# Altium PCB PIEZO_ver2_pcb2.PcbDoc
Units mil, origin at the board's own origin, x right, y up, seen from the top; angles counter-clockwise.
Board outline 800.03 x 600.03 mil, 2 copper layers (Top Layer, Bottom Layer); 7 components, 10 nets, 27 pads, 0 vias.
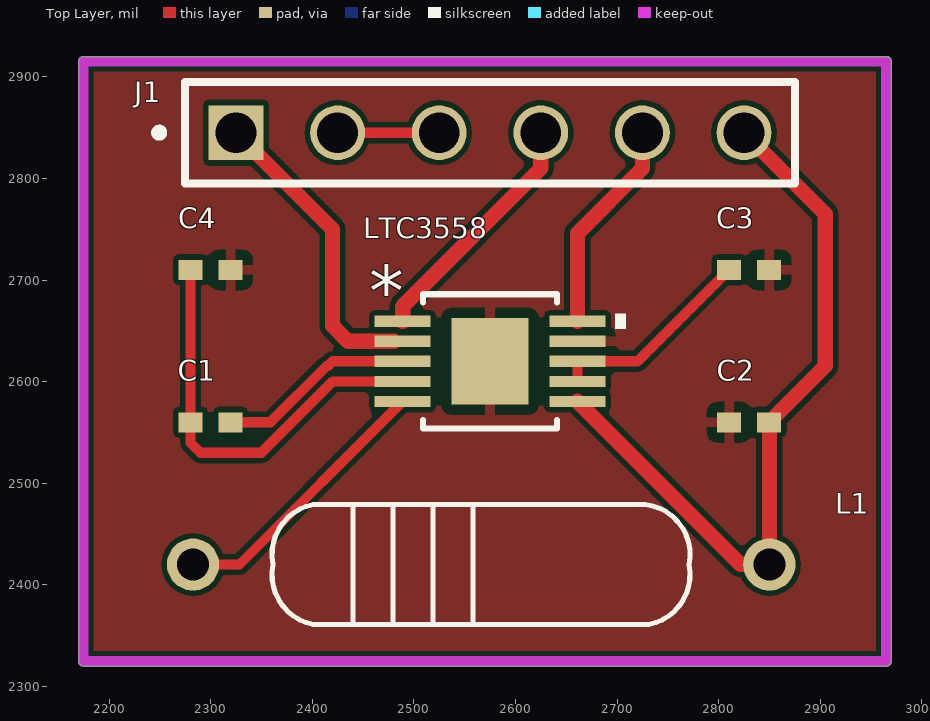
[diagram p0: Top Layer view]
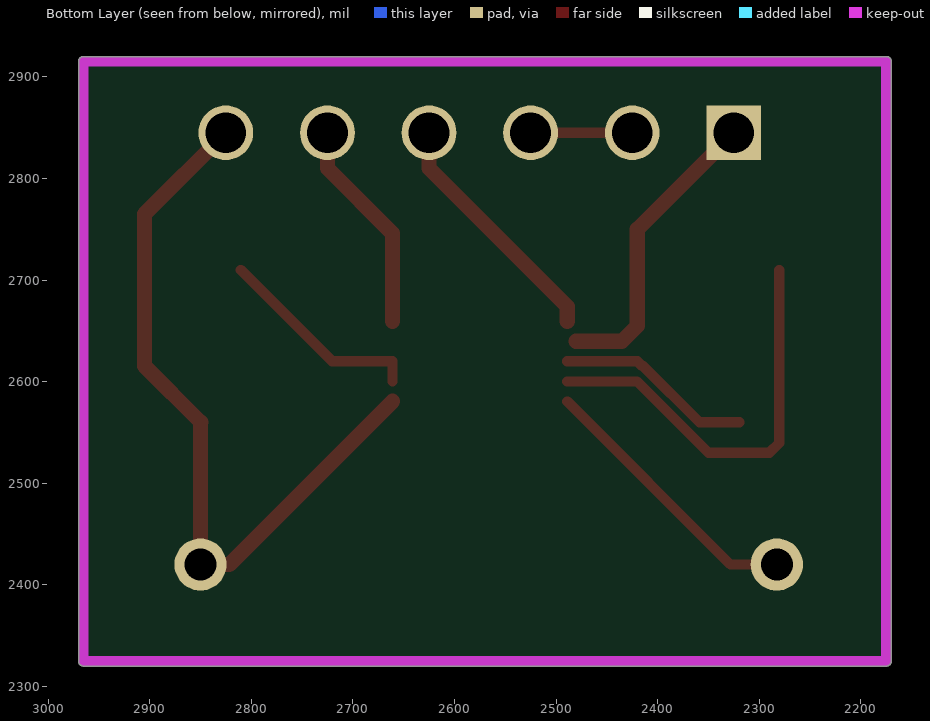
[diagram p1: Bottom Layer view, seen from below]

## Layer stack, top to bottom
Top Solder: solder mask 0.4, Solder Resist, Dk 3.5
Top Layer: signal copper 1.4
Dielectric 1: dielectric 12.6, FR-4, Dk 4.8
Bottom Layer: signal copper 1.4
Bottom Solder: solder mask 0.4, Solder Resist, Dk 3.5

## Board outline
2175,2319.99 cw(c2175,2325) 2169.99,2325 2169.99,2915 cw(c2175,2915) 2175,2920.01 2965,2920.01 cw(c2965,2915) 2970.01,2915 2970.01,2325 cw(c2965,2325) 2965,2319.99

## Design rules (kind name [scope] priority, off if disabled: settings)
Clearance [All] p1: gap=5 ignorepadtopadclearanceinfootprint=FALSE
PolygonConnect [All] p1: connectstyle=Relief reliefconductorwidth=10 reliefentries=4 polygonreliefangle="90 Angle" airgapwidth=10
RoutingVias [All] p1: holewidth=28 width=50 viastyle="Through Hole" minholewidth=28 minwidth=50 maxholewidth=28 maxwidth=50
SolderMaskExpansion [All] p1: expansion=4
Width power [InNetClass('POWER')] p1: maxlimit=15 minlimit=10 preferedwidth=15
Width signal [InNetClass('SIGNAL')] p2: maxlimit=10 minlimit=10 preferedwidth=10
30 further rules are at their usual default settings.

## Classes and differential pairs
net class SIGNAL: NetC1_1 NetC1_2 NetC3_1 NetJ1_02 NetL1_P$1
net class POWER: GND PGOOD PZ1 PZ2 VOUT

## Components (designator, comment, footprint, x,y, rotation, side; value= is the part's Value field where it differs from the comment)
C1 "Cap" 0402 2300,2560 r0 top value=1uF
C2 "Cap" 0402 2830,2560 r0 top value=47uF
C3 "Cap" 0402 2830,2710 r0 top value=4.7uF
C4 "Cap" 0402 2300,2710 r0 top value=10uF
J1 "MTSW-106-09-G-S-250" SAMTEC_MTSW-106-09-G-S-250 2575,2845 r180 top
L1 "77F470J-TR-RC" 77F 2282.68,2420 r0 top
LTC3558 "LTC3588IMSE-1PBF" MSOP-10_MSE 2575,2620 r0 top

## Footprints (in the part's own frame and the unit in brackets; to place one, negate y for a bottom-side part, rotate by r counter-clockwise, add the part's x,y. Pads: shape width x height; smd on the part's side, far side on the other; paste and mask are expansions set on the pad)
77F [mm]
  round 1.308 hole 0.8: P$1(0,0) P$2(14.41,0)
  silkscreen extent 1.98,-1.5 12.42,1.5, body extent -0.53,-1.96 15,2.03, height 3.99
0402 [mm] "Chip Capacitor, Body 1.0x0.5mm, IPC High Density"
  rect 0.6x0.5 smd: 1(-0.5,0) 2(0.5,0)
  body extent -0.55,-0.3 0.55,0.3, height 1.3
MSOP-10_MSE [mil]
  rect 55x11 smd: 1(-86,39.4) 2(-86,19.7) 3(-86,0) 4(-86,-19.7) 5(-86,-39.4) 6(86,-39.4) 7(86,-19.7) 8(86,0) 9(86,19.7) 10(86,39.4)
  rect 76x85 smd paste-78.74: 11(0,0)
  silkscreen extent -66,-66 134,66
SAMTEC_MTSW-106-09-G-S-250 [mm]
  rect 1.37x1.37 / inner round 1.37 / far side rect 1.37x1.37 hole 1.02: 01(6.35,0)
  round 1.37 hole 1.02: 02(3.81,0) 03(1.27,0) 04(-1.27,0) 05(-3.81,0) 06(-6.35,0)
  silkscreen extent -7.62,-1.27 8.37,1.27

## Part data
C1 C2 C3 C4: "Capacitor", LatestRevisionDate=17-Jul-2002, LatestRevisionNote="Re-released for DXP Platform.", PackageDescription="Radial Cap, Thru-Hole; 2 Leads; 0.3 in Pin Spacing", PackageReference=RAD-0.3, Published=8-Jun-2000, Publisher="Altium Limited"
J1 LTC3558: Package=None, Availability=Unavailable, Price=None
  J1: MP=MTSW-106-09-G-S-250
  LTC3558: MP=LTC3588IMSE-1PBF
L1: "47 µH Unshielded Drum Core, Wirewound Inductor 340 mA 1.3Ohm Max Axial", Package=Package, Check_prices=https://www.snapeda.com/parts/77F470J-TR-RC/Bourns/view-part/?ref=eda, MF=Bourns, MP=77F470J-TR-RC, SnapEDA_Link=https://www.snapeda.com/parts/77F470J-TR-RC/Bourns/view-part/?ref=snap

## Nets (pads, with @x,y where several pads share a name; then routed paths per layer and width w, separated by ;. In a path a pad name is that pad's centre, name@x,y a point inside that pad or via, vN(x,y) a via of type N, cw(c..) or ccw(c..) an arc to the next point about the centre after c; other vN are vias at no path point)
GND: C2.1 C3.2 C4.2 LTC3558.9 LTC3558.11
NetC1_1: C1.1 C4.1 LTC3558.4 | length 412.1
  Top Layer w10: C4.1 C1.1 2280.32,2539.68 2290,2530 2350,2530 2420.3,2600.3 LTC3558.4
NetC1_2: C1.2 LTC3558.3 | length 194.2
  Top Layer w10: C1.2 2358.79,2560 2414.09,2615.3 2415.3,2615.3 2420,2620 LTC3558.3
NetC3_1: C3.1 LTC3558.7 LTC3558.8 | length 206.3
  Top Layer w10: LTC3558.7 LTC3558.8 2720.31,2620 C3.1
NetJ1_02: J1.02 J1.03 | length 100
  Top Layer w10: J1.02 J1.03
NetL1_P$1: L1.P$1 LTC3558.5 | length 272.8
  Top Layer w10: L1.P$1 2328.4,2420 LTC3558.5
PGOOD: J1.05 LTC3558.10 | length 212.1
  Top Layer w15: LTC3558.10 2661,2746 2725,2810 J1.05
PZ1: J1.04 LTC3558.1 | length 241.9
  Top Layer w15: LTC3558.1 2489,2674 2625,2810 J1.04
PZ2: J1.01 LTC3558.2 | length 296.1
  Top Layer w15: J1.01 2420,2750 2420,2655 2435.3,2639.7 LTC3558.2@2480.42,2639.7
VOUT: C2.2 J1.06 L1.P$2 LTC3558.6 | length 736.7
  Top Layer w15: LTC3558.6 2821.6,2420 L1.P$2 2850,2559.69 C2.2 2905,2615.32 2905,2765 J1.06

## Polygon pours and split planes (outlines as drawn)
GND on Top Layer "GND" (solid, pour order 0): 2175,2915 2965,2915 2965,2325 2175,2325

## Keep-outs
Keep-Out Layer:
  lines w10: 2175,2325 2175,2800 2175,2915 2965,2915 2965,2325 2175,2325

## Text inside footprints (layer, text, board x,y; h text height)
LTC3558: Top Overlay "*" at 2456,2665 h50; Mechanical 13 "*" at 2506,2628 h50